# Altium PCB PCB1.PcbDoc
Units mil, origin at the board's own origin, x right, y up, seen from the top; angles counter-clockwise.
Board outline 1182.5 x 1750 mil, 2 copper layers (Top Layer, Bottom Layer); 40 components, 40 nets, 184 pads, 120 vias.
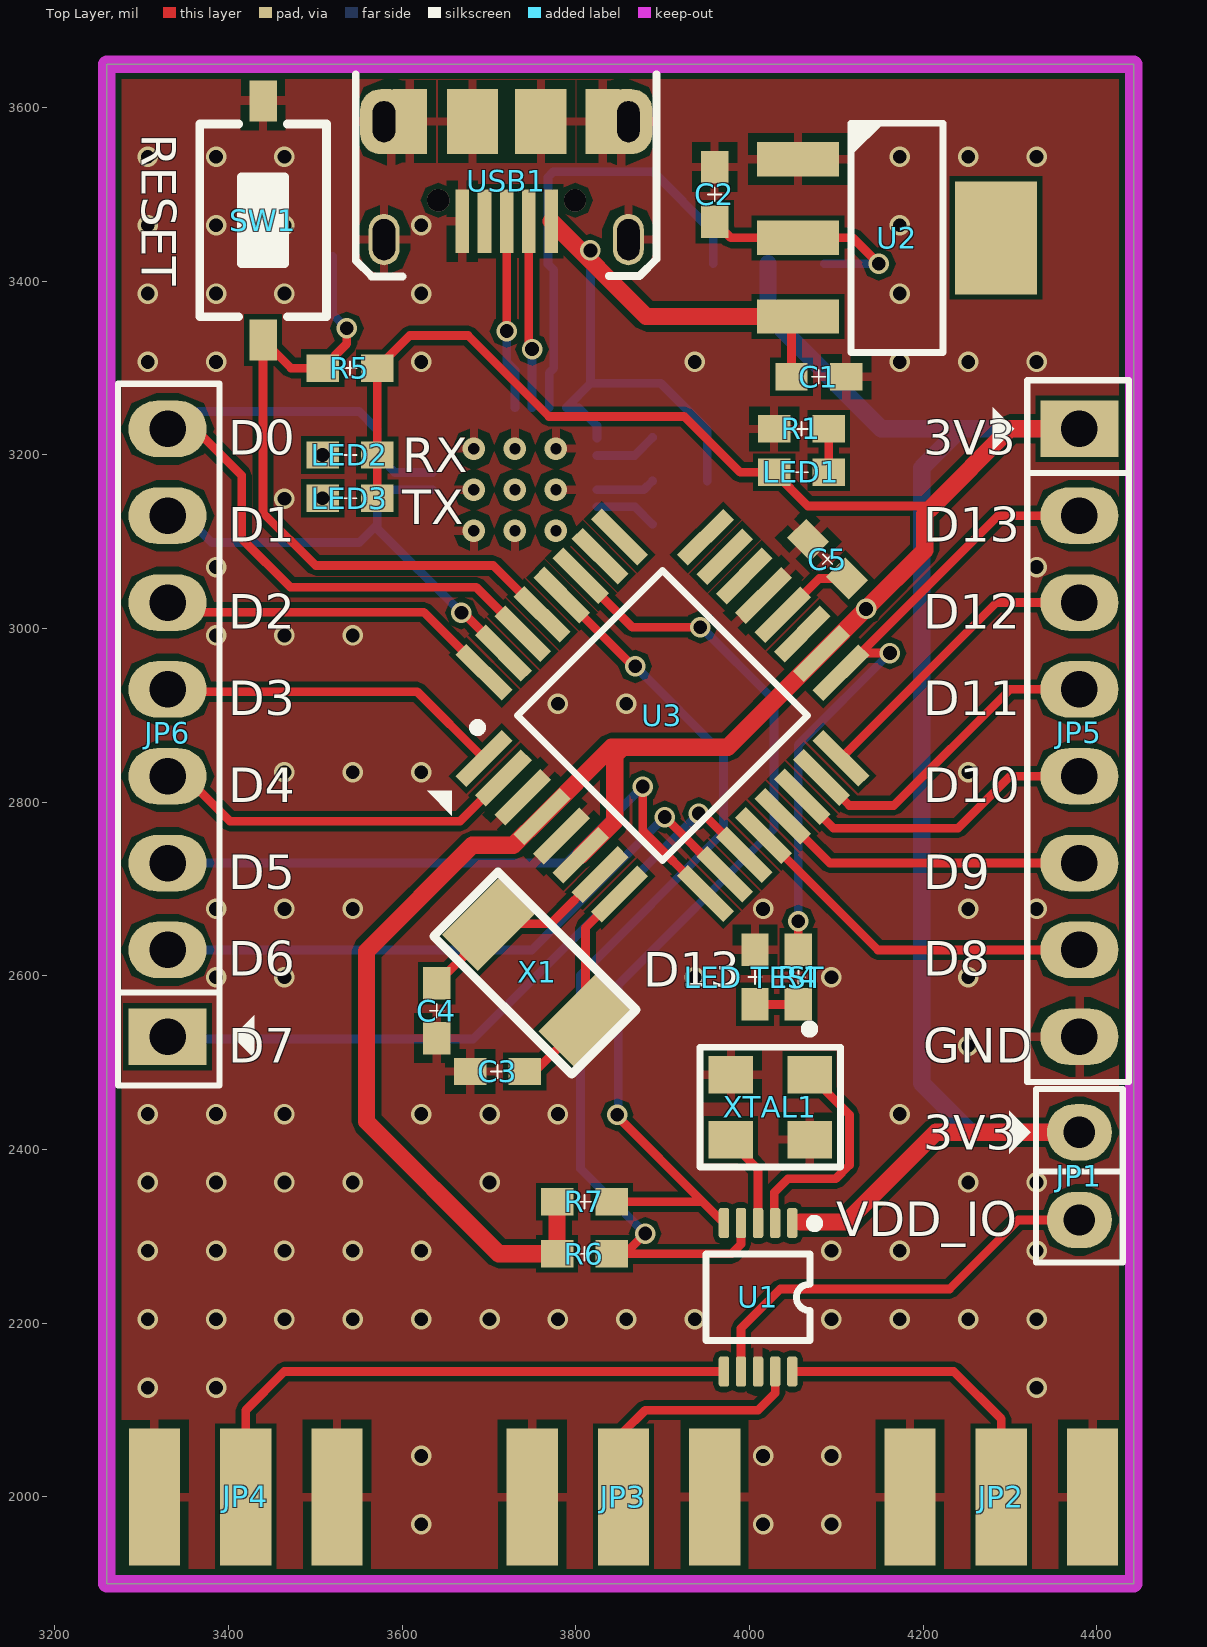
[diagram p0: Top Layer view]
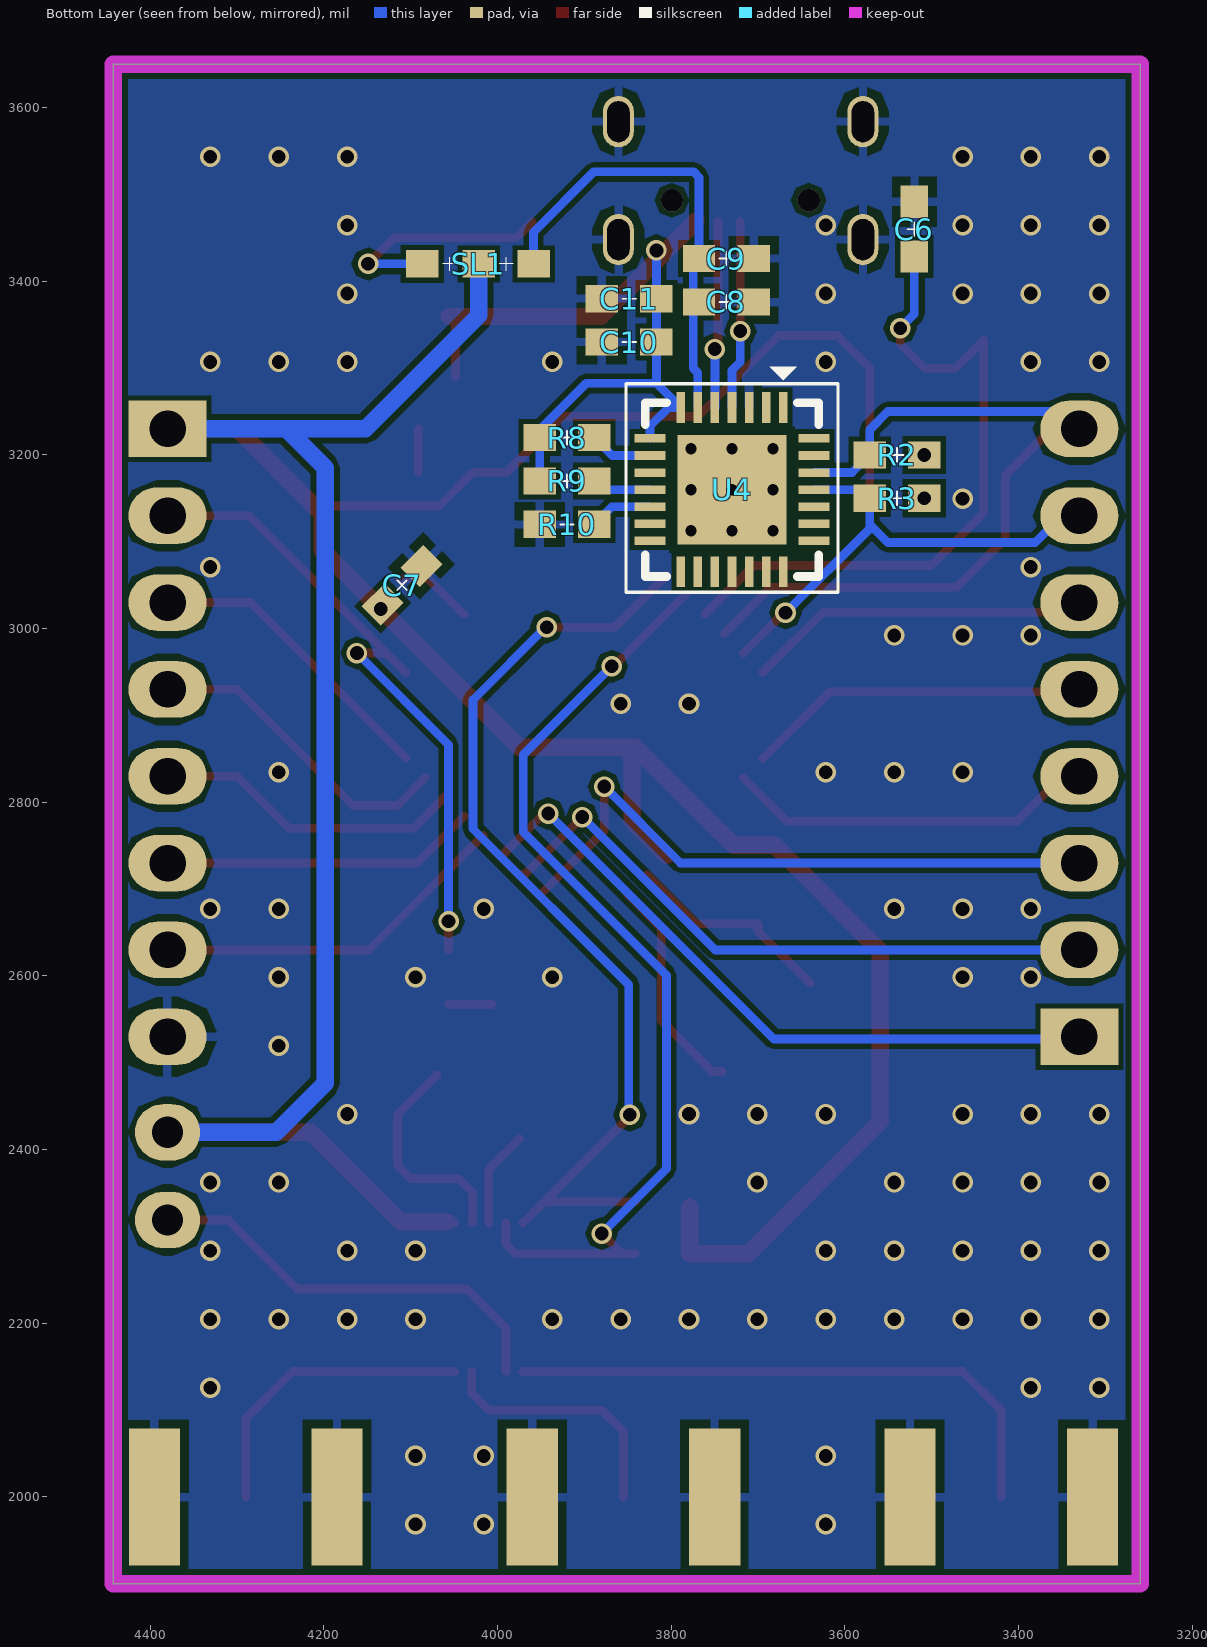
[diagram p1: Bottom Layer view, seen from below]
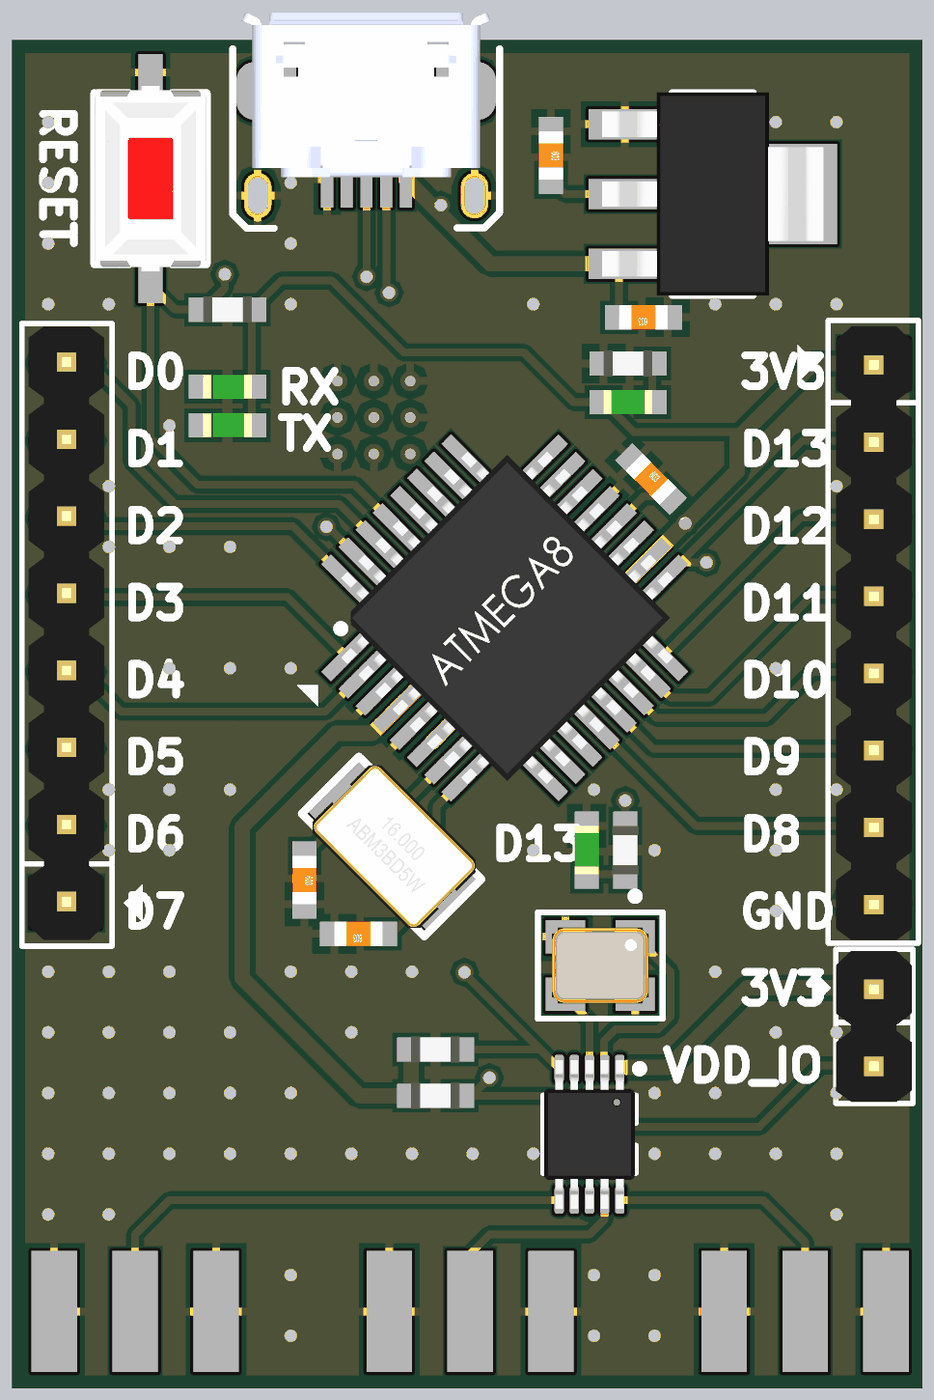
[diagram p2: 3D render of the assembled board from above, using the file's embedded part models]
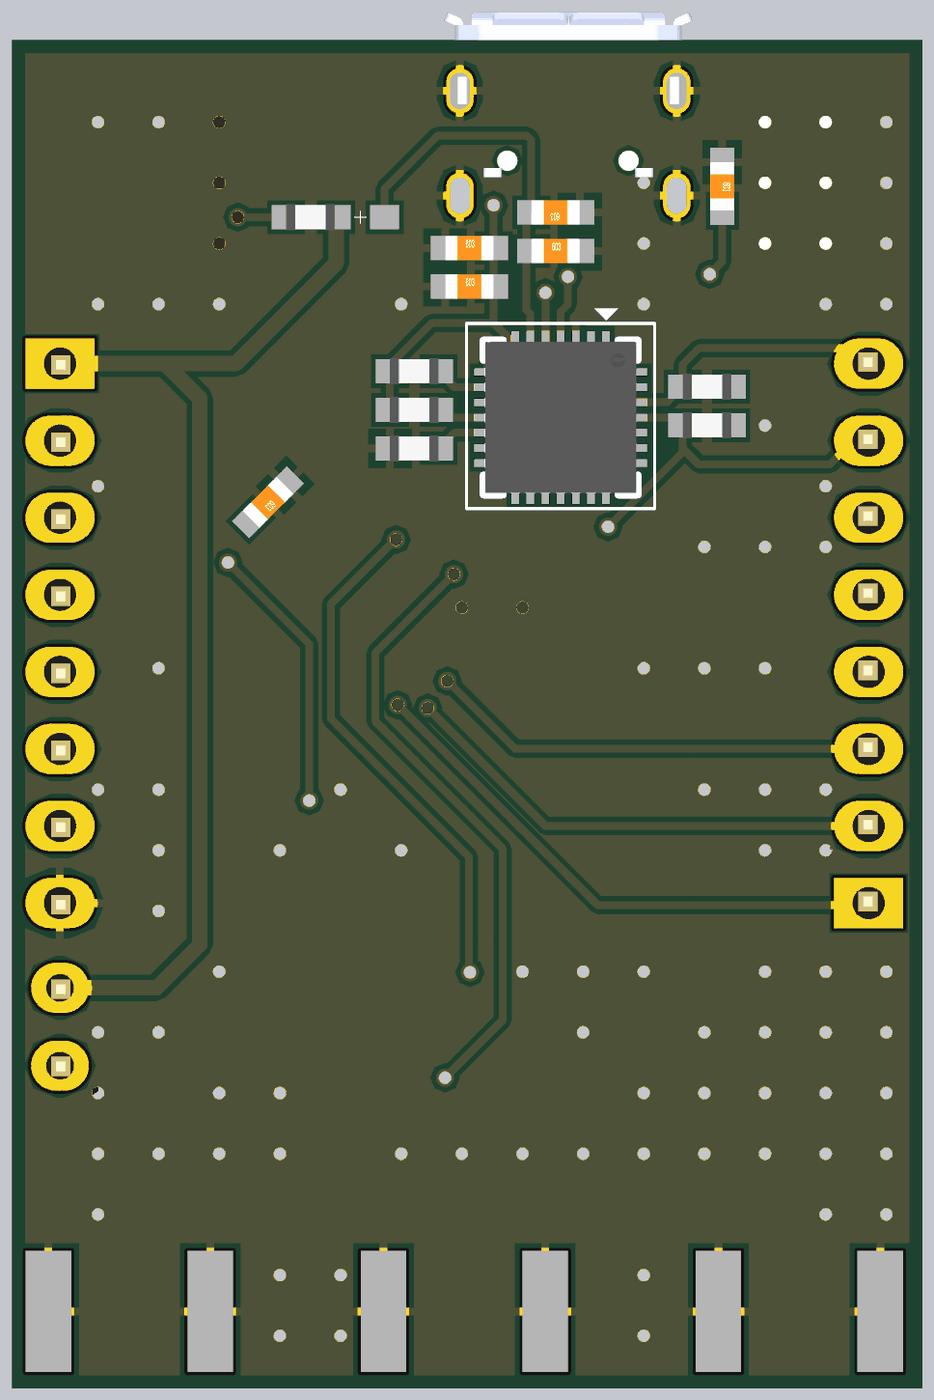
[diagram p3: 3D render of the assembled board from below, using the file's embedded part models]

## Layer stack, top to bottom
Top Solder: solder mask 0.4, Solder Resist, Dk 3.5
Top Layer: signal copper 1.4
Dielectric 1: dielectric 12.6, FR-4, Dk 4.8
Bottom Layer: signal copper 1.4
Bottom Solder: solder mask 0.4, Solder Resist, Dk 3.5

## Board outline
3260,1900 3260,3650 4442.5,3650 4442.5,1900

## Design rules (kind name [scope] priority, off if disabled: settings)
Clearance [All] p1: gap=6
PolygonConnect [All] p1: connectstyle=Relief reliefconductorwidth=10 reliefentries=4 polygonreliefangle="90 Angle" airgapwidth=10
RoutingVias [All] p1: holewidth=15.75 width=23.62 viastyle="Through Hole" minholewidth=15.75 minwidth=23.62 maxholewidth=15.75 maxwidth=23.62
SolderMaskExpansion [All] p1: expansion=4
Width [All] p1: maxlimit=30 minlimit=10 preferedwidth=20
30 further rules are at their usual default settings.

## Components (designator, comment, footprint, x,y, rotation, side; value= is the part's Value field where it differs from the comment)
C1 "100nF" 0603_cap 4080,3290 r180 top
C2 "100nF" 0603_cap 3960,3500 r270 top
C3 "22pF" 0603_cap 3710,2490 r180 top
C4 "22pF" 0603_cap 3640,2560 r270 top
C5 "100nF" 0603_cap 4090,3080 r315 top
C6 "1uF" 0603_cap 3520,3460 r270 bottom
C7 "100nF" 0603_cap 4110,3050 r315 bottom
C8 "100nF" 0603_cap 3736.52,3376.18 r180 bottom
C9 "4.7uF" 0603_cap 3736.52,3426.18 r0 bottom
C10 "10uF" 0603_cap 3848.5,3330 r180 bottom
C11 "100nF" 0603_cap 3848.5,3380 r180 bottom
JP1 "Header 2" JP2 4380,2420 r270 top
JP2 "132134" SMA-132322 4290,2000 r270 top locked
JP3 "132134" SMA-132322 3855,2000 r270 top locked
JP4 "132134" SMA-132322 3420,2000 r270 top locked
JP5 "JP8" JP8 4380,3230 r270 top
JP6 "JP8" JP8 3330,2530 r90 top
LED1 "LED SMD" 0603_LED 4060,3180 r0 top
LED2 "LED SMD" 0603_LED 3540,3200 r180 top
LED3 "LED SMD" 0603_LED 3540,3150 r180 top
"LED TEST" "LED SMD" 0603_LED 4006.43,2598.71 r90 top
R1 "1k" 0603_res 4060,3230 r0 top
R2 "1k" 0603_res 3540,3200 r180 bottom
R3 "1k" 0603_res 3540,3150 r180 bottom
R4 "1k" 0603_res 4056.43,2598.71 r270 top
R5 "1k" 0603_res 3540,3300 r0 top
R6 "10K" 0603_res 3810,2280 r180 top
R7 "10K" 0603_res 3810,2340 r180 top
R8 "4k7" 0603_res 3920,3220 r180 bottom
R9 "4k7" 0603_res 3920,3170 r180 bottom
R10 "4k7" 0603_res 3920,3120 r180 bottom
SL1 "SL" SL_0603 3990,3420 r0 bottom
SW1 "SW" SW-SMD 3440,3470 r270 top
U1 "Si5351" MSOP10_L 4010,2230 r270 top
U2 "AMS1117" SOT223_N 4170,3450 r0 top
U3 "ATMEGA328P-AU" QFP7X7-G32/X.45N 3900,2900 r45 top
U4 "CP2102" "QFN28 - 9" 3730,3160 r270 bottom
USB1 "Micro USB" "MICROUSB - v2" 3720,3540 r180 top
X1 "8Mhz" "XT 5032" 3700,2660 r315 top
XTAL1 "XT4_SMD" XT4-3.2x2.5 4024.01,2448.92 r180 top

## Footprints (in the part's own frame and the unit in brackets; to place one, negate y for a bottom-side part, rotate by r counter-clockwise, add the part's x,y. Pads: shape width x height; smd on the part's side, far side on the other; paste and mask are expansions set on the pad)
0603_cap [mm]
  rect 0.95x0.8 smd mask+0: 1(-0.8,0) 2(0.8,0)
  silkscreen extent -0.2,-0.2 0.2,0.2, body extent -0.8,-0.4 0.8,0.4, height 0.3
0603_LED [mm]
  rect 0.95x0.8 smd mask+0: 1(-0.8,0) 2(0.8,0)
  silkscreen extent -0.2,-0.2 0.2,0.2, body extent -0.8,-0.4 0.8,0.4, height 0.38
0603_res [mm]
  rect 0.95x0.8 smd mask+0: 1(-0.8,0) 2(0.8,0)
  silkscreen extent -0.2,-0.2 0.2,0.2, body extent -0.8,-0.43 0.8,0.43, height 0.48
JP2 [mil]
  oval 65x75 hole 36: 1(0,0) 2(101,0)
  silkscreen extent -50,-81 150,50, body extent -48,-50 148,48, height 323
JP8 [mil] "JP8"
  rect 65x90 hole 42: 1(0,0)
  oval 65x90 hole 42: 2(100,0) 3(200,0) 4(300,0) 5(400,0) 6(500,0) 7(600,0) 8(700,0)
  silkscreen extent -56,-100 752,57, body extent -48,-50 748,48, height 323
"MICROUSB - v2" [mm]
  rect 0.4x1.85 smd: 1(-1.312,1.8) 2(-0.663,1.8) 3(-0.012,1.8) 4(0.637,1.8) 5(1.288,1.8)
  oval 0.9x1.5 hole 0.65 slot 1.2 at 90 deg: 6(3.575,2.338) 7(-3.575,2.338) 8(3.575,-1.112) 9(-3.575,-1.112)
  rect 1.5x1.9 smd: 8(0.988,-1.112) 9(-1.012,-1.112)
  rect 1x1.9 smd: 8(2.812,-1.112) 9(-2.812,-1.112)
  rrect80% 1.5x1.9 smd: 8(3.525,-1.112) 9(-3.525,-1.112)
  silkscreen extent -4.4,-2.5 4.4,3.41, body extent -4.1,-3.7 4.1,1.73, height 2.71
MSOP10_L [mil]
  rrect50% 35x12.01 smd: 1(-85.5,39.37)
  rrect50% 35x12 smd: 2(-85.5,19.68) 3(-85.5,0) 4(-85.5,-19.68) 5(-85.5,-39.37) 6(85.5,-39.37) 7(85.5,-19.68) 8(85.5,0) 9(85.5,19.68) 10(85.5,39.37)
  silkscreen extent -90,-60 50,70, body extent -96,-59 96,59, height 45
"QFN28 - 9" [mm]
  rect 3.2x3.2 smd: 0(0,0)
  rect 0.9x0.25 smd mask+0.02: 1(-2.4,1.5) 2(-2.4,1) 3(-2.4,0.5) 4(-2.4,0) 5(-2.4,-0.5) 6(-2.4,-1) 7(-2.4,-1.5) 15(2.4,-1.5) 16(2.4,-1) 17(2.4,-0.5) 18(2.4,0) 19(2.4,0.5) 20(2.4,1) 21(2.4,1.5)
  rect 0.25x0.9 smd mask+0.02: 8(-1.5,-2.4) 9(-1,-2.4) 10(-0.5,-2.4) 11(0,-2.4) 12(0.5,-2.4) 13(1,-2.4) 14(1.5,-2.4) 22(1.5,2.4) 23(1,2.4) 24(0.5,2.4) 25(0,2.4) 26(-0.5,2.4) 27(-1,2.4) 28(-1.5,2.4)
  silkscreen extent -3.6,-3.1 3,3.1, body extent -2.5,-2.5 2.5,2.5, height 1
QFP7X7-G32/X.45N [mm] "QFP; 32 Leads; Body 7 x 7 mm; Pitch 0.8 mm"
  rect 1.905x0.45 smd: 1(-4.583,2.8) 2(-4.583,2) 3(-4.583,1.2) 4(-4.583,0.4) 5(-4.583,-0.4) 6(-4.583,-1.2) 7(-4.583,-2) 8(-4.583,-2.8) 17(4.572,-2.806) 18(4.572,-2.006) 19(4.572,-1.206) 20(4.572,-0.406) 21(4.572,0.394) 22(4.572,1.194) 23(4.572,1.994) 24(4.572,2.794)
  rect 0.45x1.905 smd: 9(-2.794,-4.572) 10(-1.994,-4.572) 11(-1.194,-4.572) 12(-0.394,-4.572) 13(0.406,-4.572) 14(1.206,-4.572) 15(2.006,-4.572) 16(2.806,-4.572) 25(2.8,4.583) 26(2,4.583) 27(1.2,4.583) 28(0.406,4.572) 29(-0.4,4.583) 30(-1.2,4.583) 31(-2,4.583) 32(-2.8,4.583)
  silkscreen extent -6.43,-3 3,3.7, body extent -4.74,-4.86 4.86,4.74, height 1.13
SL_0603 [mm]
  rect 0.95x0.8 smd mask+0: 1(-0.8,0) 2(0.8,0) 3(2.451,0)
  silkscreen extent -0.2,-0.2 1.85,0.2, body extent 0.85,-0.43 2.45,0.43, height 0.48
SMA-132322 [mm] "SMA"
  rect 4x1.5 smd: 1(0,0) 2(0,2.667) 3(0,-2.667)
  rect 4x1.5 smd far side: 4(0,-2.667) 5(0,2.667)
  body extent -1.84,-3.17 11.46,3.18, height 3.8
SOT223_N [mm] "SOT223, 4-Leads, Body 6.5x3.5mm, Pitch 2.3mm, Lead Span 7mm, IPC Medium Density"
  rect 2.4x1 smd: 1(-2.9,2.3) 2(-2.9,0) 3(-2.9,-2.3)
  rect 2.4x3.3 smd: 4(2.9,0)
  silkscreen extent -1.35,-3.35 1.35,3.4, body extent -3.65,-3.35 3.65,3.35, height 1.8
SW-SMD [mm] "Switch SMD type"
  rect 1.2x0.8 smd: 1(-3.5,0) 2(3.5,0)
  silkscreen extent -2.82,-1.85 2.82,1.85, body extent -3.05,-1.85 3.05,1.85, height 2.5
XT4-3.2x2.5 [mm]
  rect 1.3x1.1 smd: 1(-1.15,-0.95) 2(1.15,-0.95) 3(1.15,0.95) 4(-1.15,0.95)
  silkscreen extent -2.06,-2.41 2.06,1.75, body extent -1.6,-1.25 1.6,1.25, height 0.61
"XT 5032" [mm]
  rect 1.5x2.4 smd: 1(0,0) 2(4,0)
  silkscreen extent -0.89,-1.4 4.83,1.27, body extent -0.47,-1.6 4.53,1.6, height 1.31

## Part data
C1 C2 C3 C4 C5 C6 C7 C8 C9 C10 C11: library part CN4, "Cap np W0.4"
JP1: "Header, 2-Pin"
JP2 JP3 JP4: "SMA Connector - STRAIGHT JACK FOR P.C. BOARD - Female"
JP5 JP6: library part Con8, "Connector 8"
LED1 LED2 LED3 "LED TEST": library part LED-SMD-0603
R1 R2 R3 R4 R5 R6 R7 R8 R9 R10: library part R, "Resistor 1/4W"
SW1: library part SW2, "Switch button 2 pin"
U1: "I2C-PROGRAMMABLE ANY-FREQUENCY CMOS CLOCK"
U3: "8-bit AVR Microcontrollers"
U4: "SINGLE-CHIP USB-TO-UART BRIDGE"
USB1: library part "USB Micro"
X1: library part XT455k, "Crystal 455kHz Infrared"
XTAL1: "4 pin crystal surface mount"

## Via types
v1: diameter 23.62, hole 15.75, Top Layer to Bottom Layer, tented both sides, 109 vias
v2: diameter 25.98, hole 12.99, Top Layer to Bottom Layer, tented both sides, 9 vias
v3: diameter 25.59, hole 25.59, Top Layer to Bottom Layer, tented both sides, 2 vias

## Nets (pads, with @x,y where several pads share a name; then routed paths per layer and width w, separated by ;. In a path a pad name is that pad's centre, name@x,y a point inside that pad or via, vN(x,y) a via of type N, cw(c..) or ccw(c..) an arc to the next point about the centre after c; other vN are vias at no path point)
5V: C1.2 C10.2 C11.2 R8.1 R9.1 U2.3 U4.7 U4.8 USB1.1 | length 868.7
  Top Layer w10: C1.2 4048.5,3352.13 U2.3
  Top Layer w20: USB1.1 3881.36,3359.45 U2.3
  Bottom Layer w10: v1(3817.01,3435.52) C11.2 C10.2 3817.01,3282.44 ; U4.8 3824.49,3233.23 3803.23,3254.49 U4.7 3817.01,3282.44 ; R9.1 R8.1 3951.5,3228.94 3897.99,3282.44 3817.01,3282.44
D0: JP6.8 R2.1 U3.30 U4.26 | length 900.9
  Top Layer w10: JP6.8 3361.7,3230 3415.43,3176.27 3415.43,3103.62 3471.47,3047.58 3685.61,3047.58 U3.30
  Bottom Layer w10: JP6.8@3330,3250 3550.59,3250 3571.5,3229.1 R2.1 3591.81,3179.69 U4.26
D1: JP6.7 R3.1 U3.31 U4.25 | length 578.7
  Top Layer w10: v1(3668.4,3018.25) 3670.4,3018.25 U3.31
  Bottom Layer w10: JP6.7@3330,3150 3380.75,3099.25 3550.81,3099.25 3571.5,3119.93 ; U4.25 3581.5,3160 R3.1 3571.5,3119.93 ; v1(3668.4,3018.25) 3571.5,3115.15 3571.5,3119.93
D2: JP6.6 U3.32 | length 406
  Top Layer w10: JP6.6@3330,3050 3360.99,3019.01 3625.09,3019.01 U3.32
D3: JP6.5 U3.1 | length 405.7
  Top Layer w10: JP6.5@3330,2950 3352.78,2927.22 3617.61,2927.22 U3.1
D4: JP6.4 U3.2 | length 437.1
  Top Layer w10: JP6.4@3330,2850 3401.8,2778.2 3666.85,2778.2 U3.2
D5: JP6.3 U3.9 | length 744.9
  Top Layer w10: v1(3877.19,2818.1) 3877.19,2767.25 U3.9
  Bottom Layer w10: JP6.3@3330,2750 3349.84,2730.16 3789.25,2730.16 v1(3877.19,2818.1)
D6: JP6.2 U3.10 | length 740.8
  Top Layer w10: v1(3902.47,2783.05) 3968.31,2717.21 U3.10
  Bottom Layer w10: JP6.2@3330,2650 3350.07,2629.93 3749.35,2629.93 v1(3902.47,2783.05)
D7: JP6.1 U3.11 | length 800.6
  Top Layer w10: v1(3941.55,2787.07) 3946.45,2787.07 U3.11
  Bottom Layer w10: JP6.1@3330,2550 3352.55,2527.45 3681.93,2527.45 v1(3941.55,2787.07)
D8: JP5.7 U3.12 | length 418.3
  Top Layer w10: U3.12 4148.06,2630 JP5.7
D9: JP5.6 U3.13 | length 363.8
  Top Layer w10: U3.13 4092.61,2730 JP5.6
D10: JP5.5 U3.14 | length 358.8
  Top Layer w10: U3.14 4096.91,2770.24 4240.24,2770.24 4300,2830 JP5.5
D11: JP5.4 U3.15 | length 365.6
  Top Layer w10: U3.15 4115.31,2796.38 4166.38,2796.38 4300,2930 JP5.4
D12: JP5.3 U3.16 | length 348.8
  Top Layer w10: U3.16 4284.56,3030 JP5.3
D13: JP5.2 R4.1 U3.17 | length 768.7
  Top Layer w10: R4.1 v1(4056.43,2662.93) ; U3.17 U3.17@4128.11,2971.88 ; v1(4161.9,2971.88) U3.17@4128.11,2971.88 ; JP5.2 4286.23,3130 U3.17@4128.11,2971.88
  Bottom Layer w10: v1(4056.43,2662.93) 4056.43,2866.42 v1(4161.9,2971.88)
D+: U4.4 USB1.3 | length 218.6
  Top Layer w10: v1(3720.49,3342.62) USB1.3
  Bottom Layer w10: v1(3720.49,3342.62) 3720.49,3307.03 3730,3297.52 U4.4
D-: U4.5 USB1.2 | length 216.1
  Top Layer w10: USB1.2 3746.08,3325.56 v1(3749.7,3321.94)
  Bottom Layer w10: U4.5 v1(3749.7,3321.94)
"EXTERNAL 3V3": C2.2 SL1.3 U2.2 | length 271.9
  Top Layer w10: C2.2 3978.5,3450 U2.2 4119.13,3450 v1(4149.13,3420)
  Bottom Layer w10: SL1.3 v1(4149.13,3420)
GND: "LED TEST.2" C1.1 C2.1 C3.2 C4.2 C5.1 C6.1 C7.1 C8.2 C9.1 C10.1 C11.1 JP2.2 JP2.3 JP2.4 JP2.5 JP3.2 JP3.3 JP3.4 JP3.5 JP4.2 JP4.3 JP4.4 JP4.5 JP5.8 R1.1 R10.1 SW1.1 U1.8 U2.1 U3.3 U3.5 U3.21 U4.0 U4.3 USB1.5 USB1.6 USB1.7 USB1.8 USB1.9 XTAL1.2 XTAL1.4
  other v1: 3622.05,1968.51 4015.75,1968.51 4094.49,1968.51 3622.05,2047.25 4015.75,2047.25 4094.49,2047.25 3307.09,2125.99 3385.83,2125.99 4330.71,2125.99 3307.09,2204.73 3385.83,2204.73 3464.57,2204.73 3543.31,2204.73 3622.05,2204.73 3700.79,2204.73 3779.53,2204.73 3858.27,2204.73 3937.01,2204.73 4094.49,2204.73 4173.23,2204.73 4251.97,2204.73 4330.71,2204.73 3307.09,2283.47 3385.83,2283.47 3464.57,2283.47 3543.31,2283.47 3622.05,2283.47 4094.49,2283.47 4173.23,2283.47 4330.71,2283.47 3307.09,2362.21 3385.83,2362.21 3464.57,2362.21 3543.31,2362.21 3700.79,2362.21 4251.97,2362.21 4330.71,2362.21 3307.09,2440.95 3385.83,2440.95 3464.57,2440.95 3622.05,2440.95 3700.79,2440.95 3779.53,2440.95 4173.23,2440.95 4251.97,2519.69 3385.83,2598.43 3464.57,2598.43 3937.01,2598.43 4094.49,2598.43 4251.97,2598.43 3385.83,2677.17 3464.57,2677.17 3543.31,2677.17 4015.75,2677.17 4251.97,2677.17 4330.71,2677.17 3464.57,2834.65 3543.31,2834.65 3622.05,2834.65 4251.97,2834.65 3779.53,2913.39 3858.27,2913.39 3385.83,2992.13 3464.57,2992.13 3543.31,2992.13 3385.83,3070.87 4330.71,3070.87 3464.57,3149.61 3307.09,3307.09 3385.83,3307.09 3622.05,3307.09 3937.01,3307.09 4173.23,3307.09 4251.97,3307.09 4330.71,3307.09 3307.09,3385.83 3385.83,3385.83 3464.57,3385.83 3622.05,3385.83 4173.23,3385.83 3307.09,3464.57 3385.83,3464.57 3464.57,3464.57 3622.05,3464.57 4173.23,3464.57 3307.09,3543.31 3385.83,3543.31 3464.57,3543.31 4173.23,3543.31 4251.97,3543.31 4330.71,3543.31
  other v2: 3682.75,3112.75 3730,3112.75 3777.24,3112.75 3682.75,3160 3730,3160 3777.24,3160 3682.75,3207.24 3730,3207.24 3777.24,3207.24
"INTERNAL 3V3": C8.1 C9.2 SL1.1 U4.6 | length 528.7
  Bottom Layer w10: U4.6 3769.37,3294.54 3774.68,3299.85 3774.68,3412.92 3768.02,3419.59 C9.2 3768.02,3519.91 3774.07,3525.96 3889.14,3525.96 3958.5,3456.6 SL1.1
NetC3_1: C3.1 U3.8 X1.2 | length 256.1
  Top Layer w10: C3.1 3752.71,2490 X1.2 3811.36,2655.46 U3.8
NetC4_1: C4.1 U3.7 X1.1 | length 245
  Top Layer w10: C4.1 3700,2651.5 X1.1 3771.36,2660 U3.7
NetC5_2: C5.2 U3.20 | length 91
  Top Layer w10: U3.20 4080.33,3057.73 C5.2
NetLED1_2: LED1.2 R1.2 | length 50
  Top Layer w10: LED1.2 R1.2
NetLED2_2: LED2.2 R2.2
  other v1: 3508.5,3200
NetLED3_2: LED3.2 R3.2
  other v1: 3508.5,3150
"NetLED TEST_1": "LED TEST.1" R4.2 | length 50
  Top Layer w10: 4006.43,2567.21 R4.2
NetR8_2: R8.2 U4.9 | length 72.6
  Bottom Layer w10: U4.9 3867.87,3199.37 R8.2
NetR9_2: R9.2 U4.11 | length 68.2
  Bottom Layer w10: U4.11 3878.5,3160 R9.2
NetR10_2: R10.2 U4.12 | length 72.4
  Bottom Layer w10: U4.12 3868.19,3140.32 R10.2
NetU1_2: U1.2 XTAL1.1 | length 258.5
  Top Layer w10: U1.2 4028.68,2316.5 4028.68,2350.67 4044.45,2366.44 4099.55,2366.44 4115.32,2382.21 4115.32,2440.28 XTAL1.1
NetU1_3: U1.3 XTAL1.3 | length 111.7
  Top Layer w10: XTAL1.3@3974.72,2412.6 4010,2377.32 U1.3
PLL_CLOCK0: JP2.1 U1.10 | length 353.2
  Top Layer w10: U1.10 4235.5,2144.5 4290,2090 JP2.1
PLL_CLOCK1: JP3.1 U1.9 | length 293
  Top Layer w10: JP3.1 3855,2075 3880,2100 4010,2100 4029.68,2119.68 U1.9
PLL_CLOCK2: JP4.1 U1.6 | length 669.1
  Top Layer w10: JP4.1 3420,2100 3464.5,2144.5 U1.6
RESET: C6.2 R5.1 SW1.2 U3.29 | length 797.3
  Top Layer w10: v1(3536.44,3345.89) 3536.44,3327.93 R5.1 3472.2,3300 SW1.2 3440,3133.25 3500.6,3072.65 3705.08,3072.65 U3.29
  Bottom Layer w10: C6.2 3520,3362.33 v1(3536.44,3345.89)
SCL: R6.1 U1.4 U3.28 | length 1127.5
  Top Layer w10: U3.28 3868.51,2954.12 v1(3868.51,2956.62) ; R6.1 R6.1@3856.71,2280 ; v1(3880.05,2303.34) R6.1@3856.71,2280 ; U1.4 3990.32,2290.99 3979.32,2280 R6.1@3856.71,2280
  Bottom Layer w10: v1(3868.51,2956.62) 3970.3,2854.83 3970.3,2765.67 3805.46,2600.83 3805.46,2377.94 v1(3880.05,2303.34)
SDA: R7.1 U1.5 U3.27 | length 1115.8
  Top Layer w10: U3.27 3865.1,3001.71 v1(3943.53,3001.71) ; R7.1 3946.13,2340 ; v1(3847.75,2440.11) 3847.75,2438.38 3946.13,2340 ; U1.5 3946.13,2340
  Bottom Layer w10: v1(3847.75,2440.11) 3848.96,2441.32 3848.96,2589.93 4028.38,2769.36 4028.38,2917.8 3943.53,3002.65 v1(3943.53,3001.71)
VDD_3V3: C7.2 JP1.1 JP5.1 LED1.1 LED2.1 LED3.1 R5.2 R6.2 R7.2 SL1.2 U1.1 U3.4 U3.6 U3.18 | length 4484.9
  Top Layer w10: LED3.1 LED2.1 R5.2 3609.04,3337.55 3675.98,3337.55 3769.27,3244.25 3925.05,3244.25 3989.3,3180 LED1.1 4067.37,3141.13 4211.13,3141.13 ; R7.2@3778.5,2333.35 R7.2 ; U1.1 U1.1@4054.83,2320.96
  Top Layer w20: R7.2@3778.5,2333.35 R6.2 3711.5,2280 3559.11,2432.39 3559.11,2628.69 3680.85,2750.44 3728.17,2750.44 U3.4 3841.21,2863.49 3854.12,2863.49 ; U3.6 3844.8,2777.98 3844.8,2854.16 3854.12,2863.49 ; 4059.12,2316.67 4111.54,2316.67 4214.87,2420 JP1.1 ; JP5.1 4300,3230 4211.13,3141.13 4201.95,3131.95 4201.95,3090.26 v1(4134.33,3022.64) U3.18 3975.17,2863.49 3854.12,2863.49
  Bottom Layer w20: SL1.2 4021.5,3360.54 4152.04,3230 4243.41,3230 ; JP1.1 4254.74,2420 4198.42,2476.32 4198.42,3185.01 4243.41,3230 ; JP5.1 4243.41,3230
VDD_IO: JP1.2 U1.7 | length 491.1
  Top Layer w10: U1.7 3990.32,2194.17 4035.62,2239.48 4230.48,2239.48 4310,2319 JP1.2
pads on no net: U2.4 U3.19 U3.22 U3.23 U3.24 U3.25 U3.26 U4.1 U4.2 U4.10 U4.13 U4.14 U4.15 U4.16 U4.17 U4.18 U4.19 U4.20 U4.21 U4.22 U4.23 U4.24 U4.27 U4.28 USB1.4
copper on no net:
  other v3: 3641.75,3493.23 3799.23,3493.23

## Polygon pours and split planes (outlines as drawn)
GND on Bottom Layer "Bottom Layer-No Net" (solid, pour order 0): 3727.21,3649.6 4440.62,3649.6 4440.62,2866.83 4440.62,1899.1 3860.97,1899.1 3258.21,1899.1 3258.21,3289.59 3258.21,3651.25 3601.7,3651.25
GND on Top Layer "Bottom Layer-No Net" (solid, pour order 2): 3874.19,3649.6 4442.27,3649.6 4442.27,2835.45 4442.27,1900.76 3804.83,1900.76 3259.87,1900.76 3259.87,3098.03 3259.87,3651.25 3717.3,3651.25

## Keep-outs
Keep-Out Layer:
  the board outline again, w20

## Silkscreen, mask and mechanical layers (free items; w line width, h text height)
Top Overlay:
  text "RESET" at 3300,3570 h40 r270
  text "D0" at 3400,3200 h40
  text "3V3" at 4200,3200 h40
  text "RX" at 3600,3180 h40
  text "TX" at 3600,3120 h40
  text "D1" at 3400,3100 h40
  text "D13" at 4200,3100 h40
  text "D2" at 3400,3000 h40
  text "D12" at 4200,3000 h40
  text "D3" at 3400,2900 h40
  text "D11" at 4200,2900 h40
  text "D4" at 3400,2800 h40
  text "D10" at 4200,2800 h40
  text "D5" at 3400,2700 h40
  text "D9" at 4200,2700 h40
  text "D6" at 3400,2600 h40
  text "D8" at 4200,2600 h40
  text "D13" at 3878.04,2587.65 h40
  text "D7" at 3400,2500 h40
  text "GND" at 4200,2500 h40
  text "3V3" at 4200,2400 h40
  text "VDD_IO" at 4100,2300 h40